# Altium PCB ADC_Shield_lut.PcbDoc
Units mm, origin at the board's own origin, x right, y up, seen from the top; angles counter-clockwise.
Board outline 76.82 x 53.47 mm, 2 copper layers (Top Layer, Bottom Layer); 98 components, 79 nets, 308 pads, 44 vias.
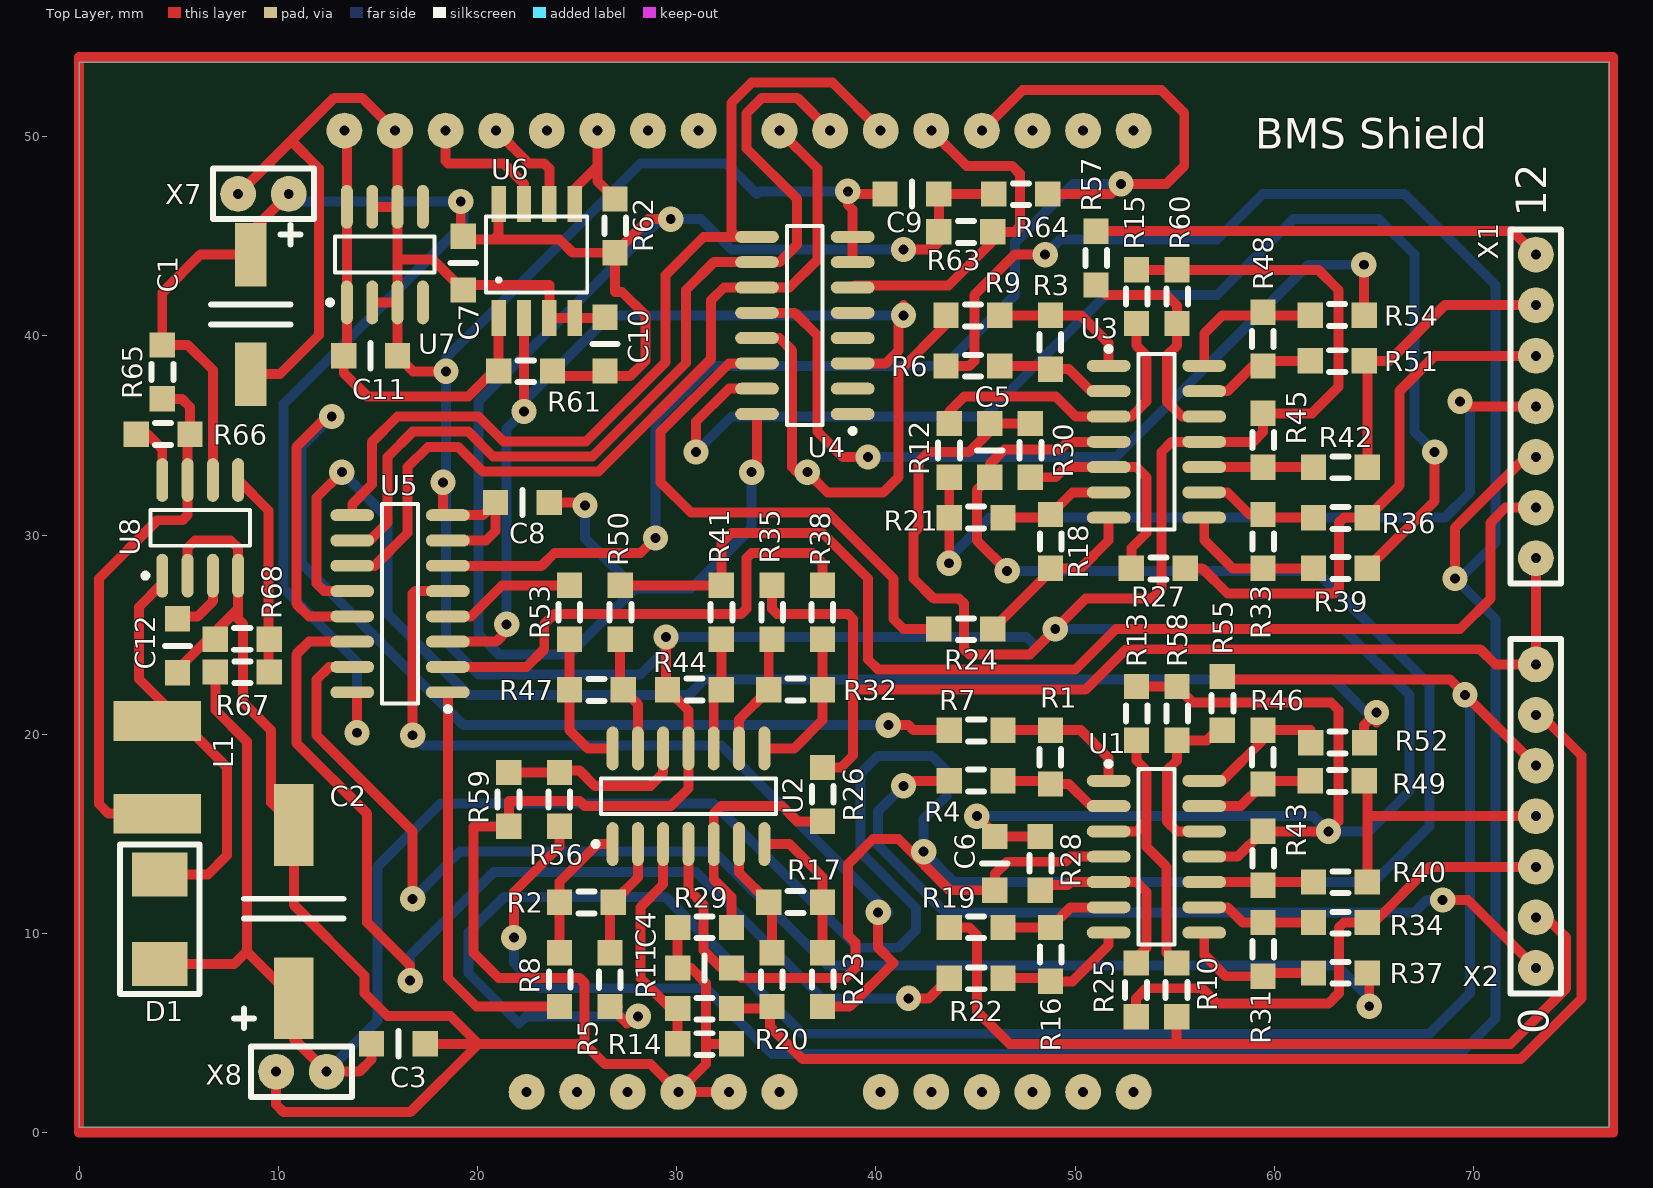
[diagram p0: Top Layer view]
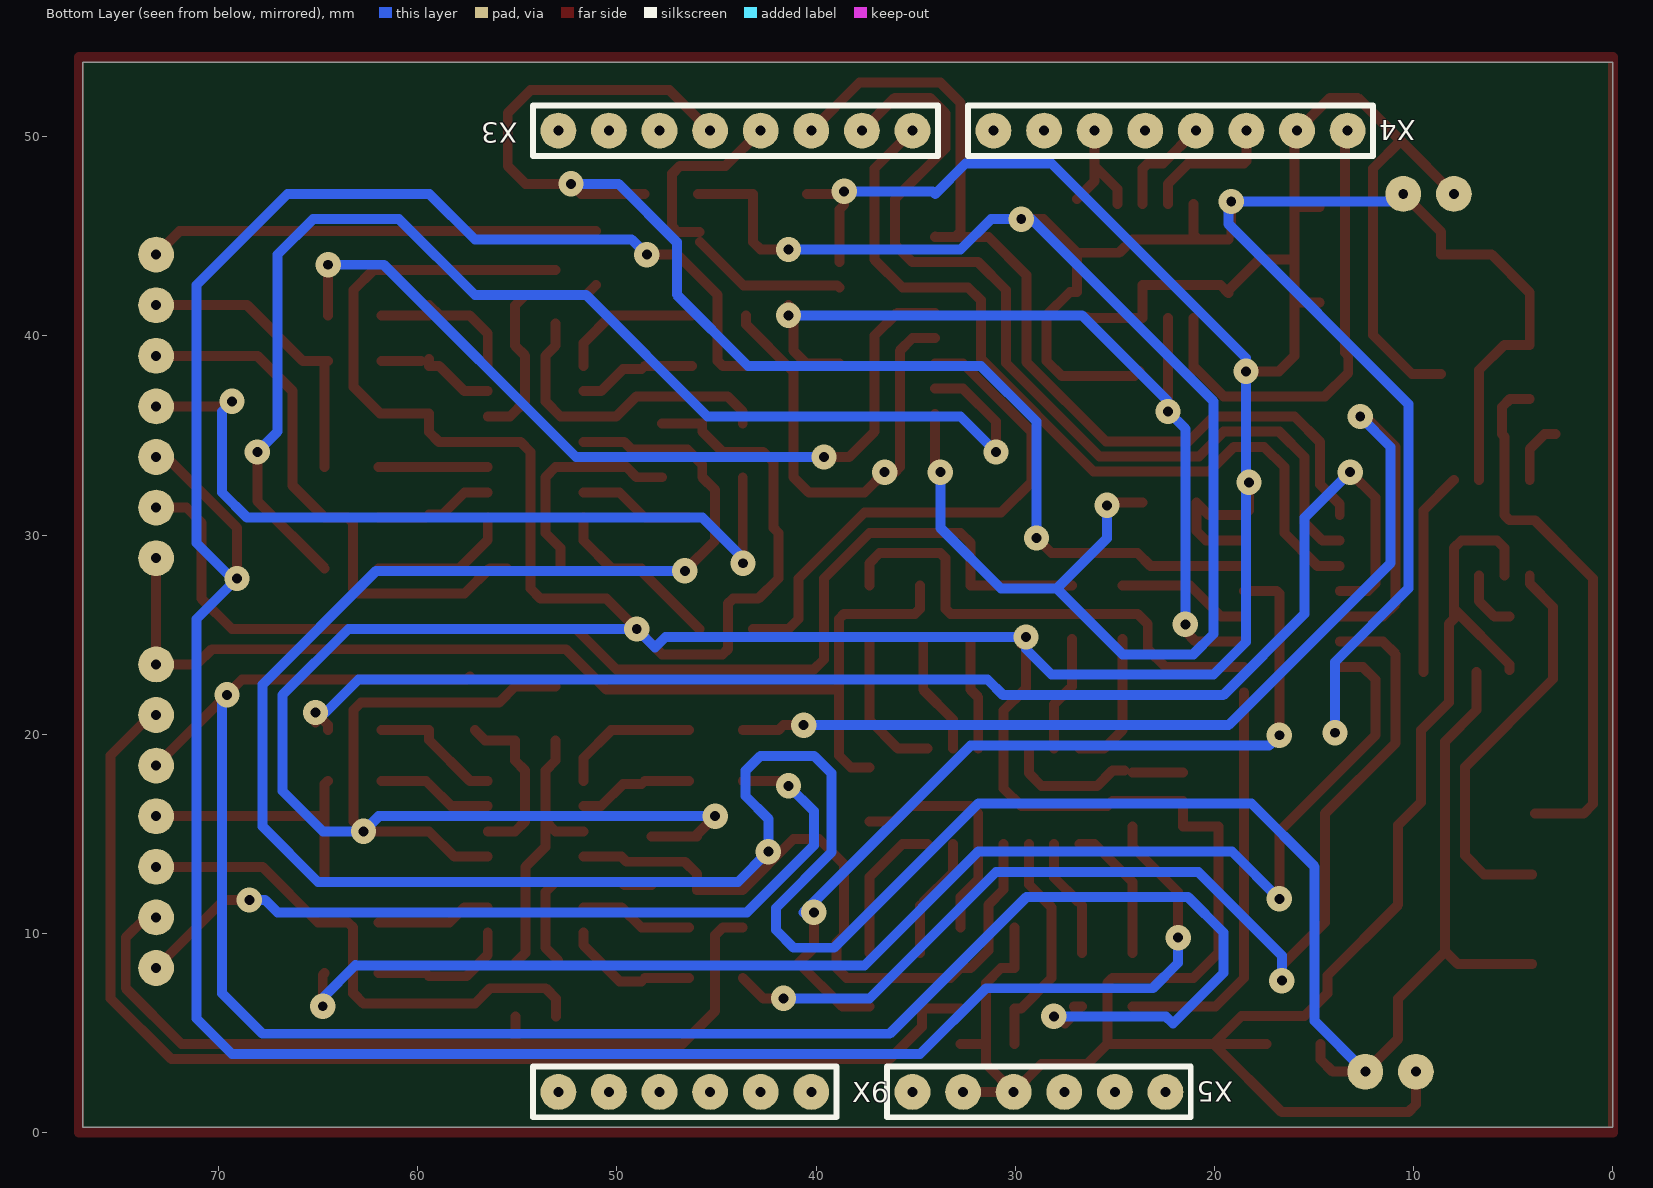
[diagram p1: Bottom Layer view, seen from below]
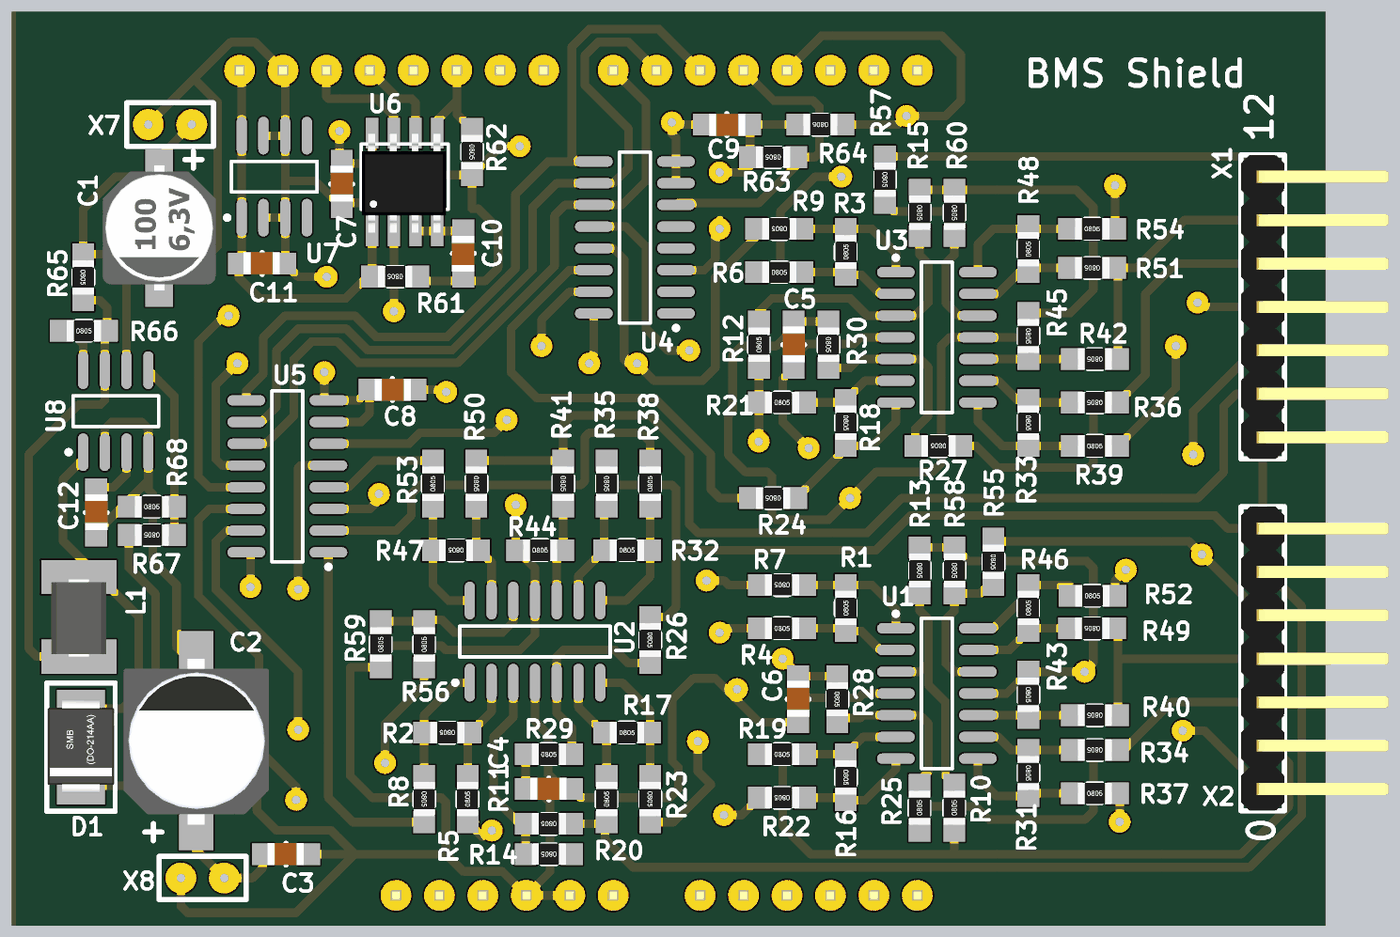
[diagram p2: 3D render of the assembled board from above, using the file's embedded part models]
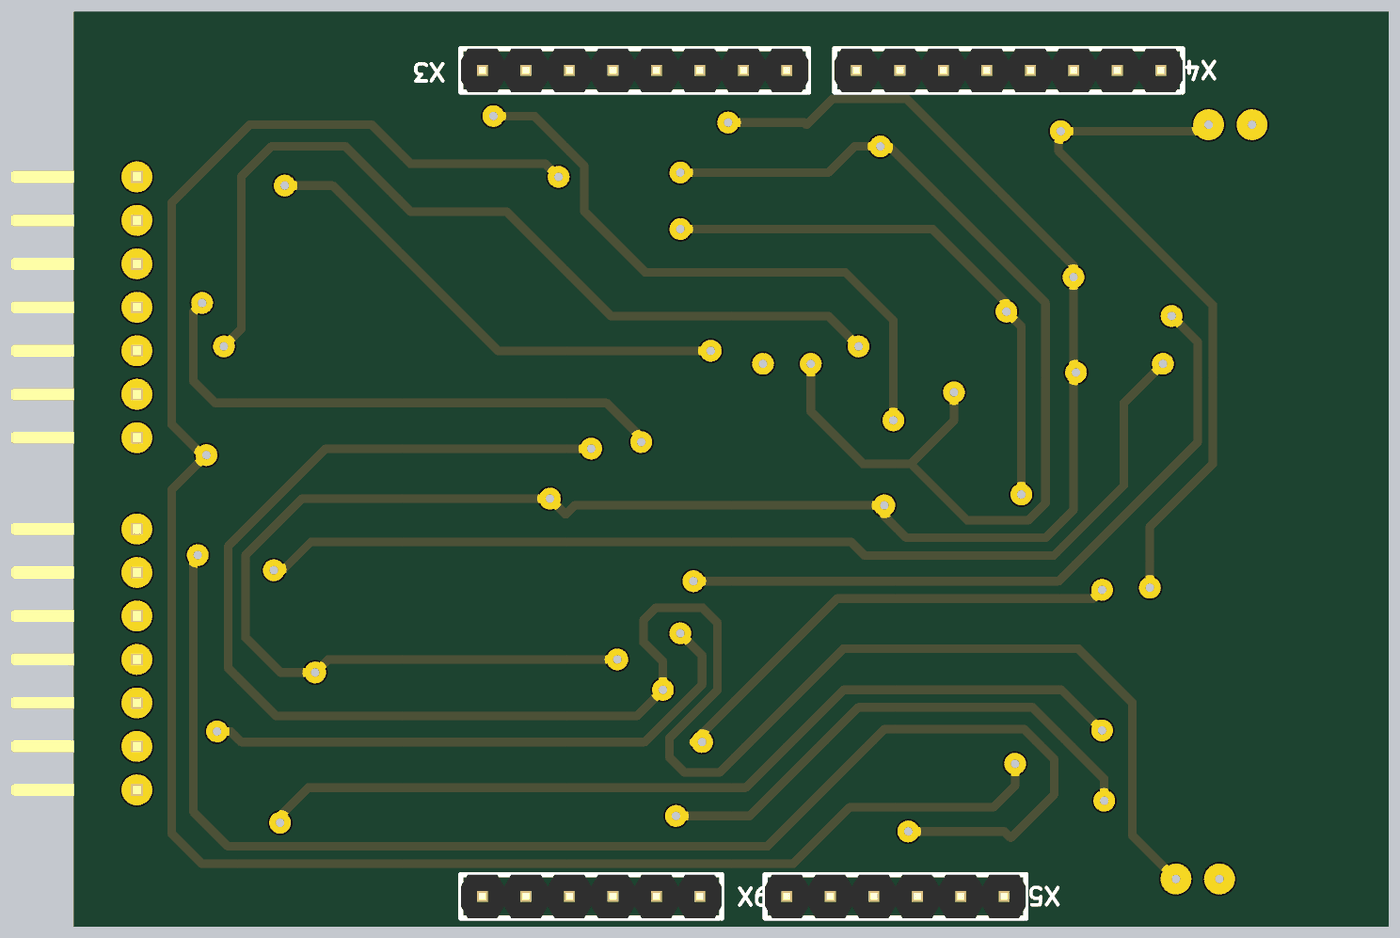
[diagram p3: 3D render of the assembled board from below, using the file's embedded part models]

## Layer stack, top to bottom
Top Solder: solder mask 0.0102, Solder Resist, Dk 3.5
Top Layer: signal copper 0.0356
Dielectric 1: dielectric 0.32, FR-4, Dk 4.8
Bottom Layer: signal copper 0.0356
Bottom Solder: solder mask 0.0102, Solder Resist, Dk 3.5

## Board outline
0,0.27 0,53.737 76.818,53.737 76.818,0.27

## Design rules (kind name [scope] priority, off if disabled: settings)
Clearance [All] p1: gap=0.254
PolygonConnect [All] p1: connectstyle=Relief reliefconductorwidth=0.254 reliefentries=4 polygonreliefangle="90 Angle" airgapwidth=0.254
RoutingVias [All] p1: holewidth=0.711 width=1.27 viastyle="Through Hole" minholewidth=0.711 minwidth=1.27 maxholewidth=0.711 maxwidth=1.27
SolderMaskExpansion [All] p1: expansion=0.102
Width [All] p1: maxlimit=2 minlimit=0.254 preferedwidth=0.5
30 further rules are at their usual default settings.

## Components (designator, comment, footprint, x,y, rotation, side; value= is the part's Value field where it differs from the comment)
C1 "100uF" CAP_EL_SMD_6.3mm 8.619,44.085 r270 top
C2 "470uF" Cap_El_SMD_10mm 10.778,6.747 r90 top
C3 "0.1uF" C0805 17.382,4.461 r180 top
C4 "100nF" C0805 32.749,8.271 r180 top
C5 "100nF" C0805 45.716,32.909 r90 top
C6 "100nF" C0805 45.97,12.175 r90 top
C7 "100nF" C0805 19.287,42.307 r90 top
C8 "100nF" C0805 20.905,31.639 r0 top
C9 "100nF" C0805 40.463,47.133 r0 top
C10 "100nF" C0805 26.399,40.943 r270 top
C11 "100nF" C0805 15.985,39.005 r180 top
C12 "722pF" C0805 4.936,23.097 r90 top
D1 "S2M" SMB_DIODE 4.047,12.97 r270 top
L1 "470uH" L1812 3.92,15.768 r90 top
R1 "249K" R0805 48.764,17.509 r90 top
R2 "249K" R0805 26.813,11.573 r180 top
R3 "249K" R0805 48.764,38.337 r90 top
R4 "499K" R0805 43.684,17.669 r0 top
R5 "499K" R0805 26.653,6.333 r90 top
R6 "499K" R0805 43.524,38.497 r0 top
R7 "10K" R0805 46.384,20.209 r180 top
R8 "10K" R0805 24.113,9.033 r270 top
R9 "10K" R0805 46.224,41.037 r180 top
R10 "499K" R0805 55.101,5.825 r90 top
R11 "499K" R0805 32.749,6.239 r180 top
R12 "499K" R0805 43.684,32.909 r90 top
R13 "249K" R0805 53.082,22.401 r270 top
R14 "249K" R0805 32.749,4.461 r180 top
R15 "249K" R0805 53.082,43.323 r270 top
R16 "249K" R0805 48.764,10.303 r270 top
R17 "249K" R0805 34.621,11.573 r0 top
R18 "249K" R0805 48.764,31.037 r270 top
R19 "499K" R0805 43.684,10.303 r0 top
R20 "499K" R0805 34.781,6.333 r90 top
R21 "499K" R0805 43.684,30.877 r0 top
R22 "10K" R0805 46.384,7.763 r180 top
R23 "10K" R0805 37.321,9.033 r270 top
R24 "10K" R0805 45.863,25.289 r180 top
R25 "499K" R0805 53.069,5.825 r90 top
R26 "499K" R0805 37.321,18.337 r270 top
R27 "499K" R0805 55.528,28.337 r180 top
R28 "249K" R0805 48.256,14.875 r270 top
R29 "249K" R0805 30.049,10.303 r0 top
R30 "249K" R0805 47.748,35.609 r270 top
R31 "249K" R0805 59.432,10.557 r270 top
R32 "249K" R0805 34.621,22.241 r0 top
R33 "249K" R0805 59.432,31.037 r270 top
R34 "499K" R0805 64.672,10.557 r180 top
R35 "499K" R0805 34.781,27.481 r270 top
R36 "499K" R0805 64.672,30.877 r180 top
R37 "10K" R0805 61.972,8.017 r0 top
R38 "10K" R0805 37.321,24.781 r90 top
R39 "10K" R0805 61.972,28.337 r0 top
R40 "499K" R0805 64.672,12.589 r180 top
R41 "499K" R0805 32.241,27.481 r270 top
R42 "499K" R0805 64.672,33.417 r180 top
R43 "249K" R0805 59.432,15.129 r270 top
R44 "249K" R0805 29.541,22.241 r0 top
R45 "249K" R0805 59.432,36.117 r270 top
R46 "249K" R0805 59.432,17.509 r90 top
R47 "249K" R0805 27.321,22.241 r180 top
R48 "249K" R0805 59.432,38.497 r90 top
R49 "499K" R0805 64.512,17.669 r180 top
R50 "499K" R0805 27.161,27.481 r270 top
R51 "499K" R0805 64.512,38.751 r180 top
R52 "10K" R0805 61.832,19.574 r0 top
R53 "10K" R0805 24.621,24.781 r90 top
R54 "10K" R0805 61.812,41.037 r0 top
R55 "499K" R0805 57.387,22.909 r270 top
R56 "499K" R0805 24.113,15.383 r90 top
R57 "499K" R0805 51.05,45.261 r270 top
R58 "249K" R0805 55.114,22.401 r270 top
R59 "249K" R0805 21.573,15.383 r90 top
R60 "249K" R0805 55.114,43.323 r270 top
R61 "1K" R0805 23.765,38.243 r180 top
R62 "10K" R0805 26.907,46.879 r270 top
R63 "10K" R0805 45.863,45.228 r180 top
R64 "10K" R0805 48.624,47.133 r180 top
R65 "1.5" R0805 4.174,39.546 r270 top
R66 "180" R0805 2.871,35.068 r0 top
R67 "15K" R0805 9.541,23.13 r180 top
R68 "1K" R0805 6.841,24.781 r0 top
U1 "LM324AD" SO14_N 54.085,13.859 r0 top
U2 "LM324AD" SO14_N 30.59,16.894 r90 top
U3 "LM324AD" SO14_N 54.085,34.687 r0 top
U4 "M74HC4051M1R" SO16_N 36.432,40.529 r180 top
U5 "M74HC4051M1R" SO16_N 16.112,26.559 r180 top
U6 "MCP3201-BI/SN" SO8 21.065,40.91 r0 top
U7 "TL431ID" SO8_N 15.35,44.085 r90 top
U8 "MC34063AD" 751-05_N 6.079,30.369 r90 top
X1 "PINS 7x2.54" "PINS 7X2.54R angle" 73.135,44.085 r270 top
X2 "PINS 7x2.54" "PINS 7X2.54R angle" 73.135,23.511 r270 top
X3 "Pins 8x2.54" "Pins 8x2.54" 52.942,50.308 r180 bottom
X4 "Pins 8x2.54" "Pins 8x2.54" 31.098,50.308 r180 bottom
X5 "Pins 6x2.54" "Pins 6x2.54" 35.162,2.048 r180 bottom
X6 "Pins 6x2.54" "Pins 6x2.54" 40.242,2.048 r0 bottom
X7 "Pins 2x2.54" "Pins 2x2.54" 7.984,47.133 r0 top
X8 "Pins 2x2.54" "Pins 2x2.54" 9.889,3.064 r0 top

## Footprints (in the part's own frame and the unit in brackets; to place one, negate y for a bottom-side part, rotate by r counter-clockwise, add the part's x,y. Pads: shape width x height; smd on the part's side, far side on the other; paste and mask are expansions set on the pad)
751-05_N [mm] "SOIC, 8-Leads, Body 4.9x3.9mm, Pitch 1.27mm, IPC Medium Density"
  oval 2.2x0.6 smd: 1(-2.4,1.905) 2(-2.4,0.635) 3(-2.4,-0.635) 4(-2.4,-1.905) 5(2.4,-1.905) 6(2.4,-0.635) 7(2.4,0.635) 8(2.4,1.905)
  silkscreen extent -2.52,-2.5 0.9,2.88, body extent -1.95,-2.45 1.95,2.45, height 1.75
C0805 [mm]
  rect 1.27x1.27 smd: 1(0,0) 2(2.7,0)
  silkscreen extent 1.35,-0.63 1.35,0.64, body extent 0.32,-0.66 2.42,0.64, height 0.51
CAP_EL_SMD_6.3mm [mm]
  rect 3.2x1.6 smd: 1(0,0) 2(6,0)
  silkscreen extent -1.5,-2 3.5,2.5, body extent -0.65,-3.3 6.65,3.3, height 5.9
Cap_El_SMD_10mm [mm]
  rect 4.1x2 smd: 1(0,0) 2(8.7,0)
  silkscreen extent -1.5,-2.5 5,3, body extent -0.55,-4.25 9.15,4.25, height 10.3
L1812 [mm]
  rect 2x4.4 smd: 1(0.25,0) 2(4.9,0)
  body extent 0.25,-1.6 4.75,1.6, height 3.2
"Pins 2x2.54" [mm]
  round 1.8 hole 0.5: 1(0,0) 2(2.54,0)
  silkscreen extent -1.27,-1.27 3.81,1.27
"Pins 6x2.54" [mm]
  round 1.8 hole 0.5: 1(0,0) 2(2.54,0) 3(5.08,0) 4(7.62,0) 5(10.16,0) 6(12.7,0)
  silkscreen extent -1.27,-1.27 13.97,1.27, body extent -1.27,-1.27 13.97,1.27, height 8.81
"PINS 7X2.54R angle" [mm]
  round 1.8 hole 0.5: 1(0,0) 2(2.54,0) 3(5.08,0) 4(7.62,0) 5(10.16,0) 6(12.7,0) 7(15.24,0)
  silkscreen extent -1.27,-1.27 16.51,1.27, body extent -1.27,-1.27 16.51,7.35, height 5.45
"Pins 8x2.54" [mm]
  round 1.8 hole 0.5: 1(0,0) 2(2.54,0) 3(5.08,0) 4(7.62,0) 5(10.16,0) 6(12.7,0) 7(15.24,0) 8(17.78,0)
  silkscreen extent -1.27,-1.27 19.05,1.27, body extent -1.27,-1.27 19.05,1.27, height 8.81
R0805 [mm]
  rect 1.27x1.27 smd: 1(0,0) 2(2.7,0)
  silkscreen extent 0.94,-0.53 1.75,0.56, body extent 0.35,-0.62 2.35,0.63, height 0.61
SMB_DIODE [mm]
  rect 2.2x2.8 smd: 1(0,0) 2(4.5,0)
  silkscreen extent -1.5,-2 6,2, body extent -0.55,-1.95 4.95,1.95, height 2.45
SO8 [mm]
  rect 0.72x1.8 smd: 1(0,0) 2(1.27,0) 3(2.54,0) 4(3.81,0) 5(3.81,5.715) 6(2.54,5.715) 7(1.27,5.715) 8(0,5.715)
  silkscreen extent -0.64,1.27 4.44,5.08, body extent -0.58,-0.1 4.32,5.68, height 1.45
SO8_N [mm] "SOIC, 8-Leads, Body 4.9x3.9mm, Pitch 1.27mm, IPC Medium Density"
  oval 2.2x0.6 smd: 1(-2.4,1.905) 2(-2.4,0.635) 3(-2.4,-0.635) 4(-2.4,-1.905) 5(2.4,-1.905) 6(2.4,-0.635) 7(2.4,0.635) 8(2.4,1.905)
  silkscreen extent -2.52,-2.5 0.9,2.88, body extent -1.95,-2.45 1.95,2.45, height 1.75
SO14_N [mm] "SOIC, 14-Leads, Body 8.7x3.9mm, Pitch 1.27mm, IPC Medium Density"
  oval 2.2x0.6 smd: 1(-2.4,3.81) 2(-2.4,2.54) 3(-2.4,1.27) 4(-2.4,0) 5(-2.4,-1.27) 6(-2.4,-2.54) 7(-2.4,-3.81) 8(2.4,-3.81) 9(2.4,-2.54) 10(2.4,-1.27) 11(2.4,0) 12(2.4,1.27) 13(2.4,2.54) 14(2.4,3.81)
  silkscreen extent -2.52,-4.4 0.9,4.78, body extent -1.95,-4.33 1.95,4.33, height 1.75
SO16_N [mm] "SOIC, 16-Leads, Body 9.9x3.9mm, Pitch 1.27mm, IPC Medium Density"
  oval 2.2x0.6 smd: 1(-2.4,4.445) 2(-2.4,3.175) 3(-2.4,1.905) 4(-2.4,0.635) 5(-2.4,-0.635) 6(-2.4,-1.905) 7(-2.4,-3.175) 8(-2.4,-4.445) 9(2.4,-4.445) 10(2.4,-3.175) 11(2.4,-1.905) 12(2.4,-0.635) 13(2.4,0.635) 14(2.4,1.905) 15(2.4,3.175) 16(2.4,4.445)
  silkscreen extent -2.53,-5 0.9,5.42, body extent -1.95,-4.95 1.95,4.95, height 1.75

## Part data
C1 C2: library part Cond_polar
C3 C4 C5 C6 C7 C8 C9 C10 C11 C12: library part Condensator
D1: library part Diod
L1: library part Inductance
R1 R2 R3 R4 R5 R6 R7 R8 R9 R10 R11 R12 R13 R14 R15 R16 R17 R18 R19 R20 R21 R22 R23 R24 R25 R26 R27 R28 R29 R30 R31 R32 R33 R34 R35 R36 R37 R38 R39 R40 R41 R42 R43 R44 R45 R46 R47 R48 R49 R50 R51 R52 R53 R54 R55 R56 R57 R58 R59 R60 R61 R62 R63 R64 R65 R66 R67 R68: library part Resistor
U1 U2 U3: "Low-Power Quad Operational Amplifier"
U4 U5: "Analog Multiplexer/Demultiplexer Single 8-Channel"
U7: "Programmable Voltage Reference"
U8: "DC-to-DC Converter Control Circuit"

## Via types
v1: diameter 1.27, hole 0.5, Top Layer to Bottom Layer, 44 vias

## Nets (pads, with @x,y where several pads share a name; then routed paths per layer and width w, separated by ;. In a path a pad name is that pad's centre, name@x,y a point inside that pad or via, vN(x,y) a via of type N, cw(c..) or ccw(c..) an arc to the next point about the centre after c; other vN are vias at no path point)
+20V: C2.1 C3.2 C4.1 C5.1 C6.1 D1.2 R67.2 U1.4 U2.4 U3.4 X8.2 | length 197.8
  Top Layer w0.5: D1.2 7.785,8.47 8.42,9.105 ; R67.2 6.841,21.225 8.42,19.646 8.42,9.105 ; C3.2 14.682,3.682 14.064,3.064 X8.2 10.778,4.715 C2.1 8.42,9.105 ; U2.4 30.59,12.208 31.352,11.446 31.352,9.16 32.241,8.271 C4.1 33.257,7.763 38.464,7.763 38.972,8.271 38.972,9.541 38.611,9.902 38.611,13.498 39.861,14.748 41.131,14.748 43.704,12.175 C6.1 45.97,12.983 46.592,13.605 49.513,13.605 49.767,13.859 U1.4 ; v1(46.592,28.21) 45.068,29.734 45.068,32.261 C5.1 45.716,33.557 46.465,34.306 49.259,34.306 49.64,34.687 U3.4
  Bottom Layer w0.5: X8.2 14.969,5.604 14.969,13.351 18.144,16.526 31.86,16.526 39.099,9.287 41.131,9.287 42.02,10.176 42.02,11.287 39.226,14.081 39.226,18.05 40.095,18.919 42.802,18.919 43.544,18.177 43.544,16.907 42.401,15.764 v1(42.401,14.113) 43.925,12.589 65.007,12.589 67.801,15.383 67.801,22.495 62.086,28.21 v1(46.592,28.21)
A: U4.11 U5.11 X3.8 | length 41.7
  Top Layer w0.5: U5.11 14.842,28.464 16.493,30.115 16.493,33.417 17.509,34.433 19.033,34.433 20.267,33.199 26.078,33.199 31.733,38.854 31.733,41.799 32.368,42.434 35.67,42.434 37.067,43.831 37.067,48.403 X3.8
ADC_IN: U4.3 U5.3 U6.2 | length 45.6
  Top Layer w0.5: U5.3 20.938,24.654 21.463,25.179 v1(21.463,25.527) ; v1@22.335,36.719 U6.2 ; U4.3 40.496,38.624 41.131,39.259 41.131,41.291 41.385,41.545 v1(41.385,41.037)
  Bottom Layer w0.5: v1(21.463,25.527) 21.463,35.339 v1(22.335,36.211) 22.335,36.719 26.653,41.037 v1(41.385,41.037)
B: U4.10 U5.10 X3.7 | length 46.4
  Top Layer w0.5: U5.10 14.588,29.734 15.477,30.623 15.477,33.925 16.747,35.195 19.541,35.195 20.783,33.953 25.766,33.953 30.463,38.65 30.463,42.307 31.86,43.704 U4.10 35.162,43.704 36.051,44.593 36.051,46.879 33.511,49.419 33.511,51.181 34.289,51.959 36.051,51.959 X3.7
BAL0: R4.1 X2.7 | length 42
  Top Layer w0.5: v1(41.385,17.415) 41.639,17.669 R4.1 ; v1(68.453,11.684) 69.722,11.684 X2.7
  Bottom Layer w0.5: v1(41.385,17.415) 40.115,16.145 40.115,14.413 43.463,11.065 67.039,11.065 67.658,11.684 v1(68.453,11.684)
BAL1: R10.1 R19.1 X2.6 | length 42.6
  Top Layer w0.5: R19.1 44.687,10.303 45.068,9.922 45.068,6.112 46.719,4.461 55.101,4.461 ; R10.1 55.101,4.461 ; X2.6 73.643,10.811 74.659,9.795 74.659,7.255 71.865,4.461 55.101,4.461
BAL2: R25.1 R34.1 X2.5 | length 26.3
  Top Layer w0.5: R25.1 53.069,6.747 53.577,7.255 56.371,7.255 57.133,6.493 62.734,6.493 63.242,7.001 63.242,10.303 63.496,10.557 R34.1 65.007,10.557 67.801,13.351 X2.5
BAL3: R40.1 R49.1 X2.4 | length 13.6
  Top Layer w0.5: R49.1 64.672,17.509 64.672,15.891 ; R40.1 64.672,15.891 ; X2.4 64.672,15.891
BAL4: R5.1 R55.1 X2.3 | length 101.2
  Top Layer w0.5: R5.1 R5.1@27.067,6.333 ; R5.1@26.86,6.126 27.509,5.477 27.874,5.842 v1(28.067,5.842) ; R55.1 57.547,22.749 68.817,22.749 v1(69.579,21.987) X2.3
  Bottom Layer w0.5: v1(28.067,5.842) 22.446,5.842 22.081,5.477 19.541,8.017 19.541,10.049 21.319,11.827 29.447,11.827 36.305,4.969 67.801,4.969 69.833,7.001 69.833,21.733 v1(69.579,21.987)
BAL5: R11.1 R20.1 X2.2 | length 60.8
  Top Layer w0.5: R11.1 34.687,6.239 34.687,5.317 36.305,3.699 72.373,3.699 75.421,6.747 75.421,18.939 73.389,20.971 X2.2
BAL6: R26.1 R35.1 X1.7 X2.1 | length 54.9
  Top Layer w0.5: R35.1 34.781,26.305 35.035,26.051 38.591,26.051 38.845,25.797 38.845,22.241 ; R26.1 38.243,18.337 38.845,18.939 38.845,22.241 ; X1.7 X2.1 71.103,23.511 70.341,24.273 52.561,24.273 50.529,22.241 38.845,22.241
BAL7: R41.1 R50.1 X1.6 | length 59.1
  Top Layer w0.5: R50.1 R41.1 32.241,29.607 32.749,30.115 37.321,30.115 39.607,27.829 39.607,23.765 40.115,23.257 50.021,23.257 52.053,25.289 69.325,25.289 70.849,26.813 70.849,30.623 71.611,31.385 X1.6
BAL8: R6.1 R56.1 X1.5 | length 141.4
  Top Layer w0.5: v1(21.827,9.795) 21.827,12.081 24.113,14.367 R56.1 ; R6.1 44.687,38.497 44.941,38.751 44.941,42.053 46.973,44.085 v1(48.497,44.085) ; v1(69.071,27.829) 69.071,30.369 72.627,33.925 X1.5
  Bottom Layer w0.5: v1(21.827,9.795) 21.827,8.525 23.097,7.255 31.479,7.255 34.781,3.953 69.325,3.953 71.103,5.731 71.103,25.797 v1(69.071,27.829) 69.325,27.829 71.103,29.607 71.103,42.561 66.531,47.133 59.419,47.133 57.133,44.847 49.259,44.847 v1(48.497,44.085)
BAL9: R12.1 R21.1 X1.4 | length 40.8
  Top Layer w0.5: v1(43.671,28.591) 43.671,28.845 43.684,28.858 R21.1 R12.1 ; v1(69.325,36.719) 69.579,36.465 X1.4
  Bottom Layer w0.5: v1(43.671,28.591) 43.671,28.845 45.703,30.877 68.563,30.877 69.833,32.147 69.833,36.211 v1(69.325,36.719)
BAL10: R27.1 R36.1 X1.3 | length 27.8
  Top Layer w0.5: R27.1 56.384,28.337 57.654,27.067 62.988,27.067 63.242,27.321 63.242,30.623 63.496,30.877 R36.1 66.277,32.482 66.277,37.227 68.055,39.005 X1.3
BAL11: R42.1 R51.1 X1.2 | length 15
  Top Layer w0.5: R51.1 65.769,38.751 68.563,41.545 X1.2 ; R42.1 R51.1@64.672,38.591
BAL12: R57.1 X1.1 | length 22.6
  Top Layer w0.5: R57.1 71.959,45.261 X1.1
C: U4.9 U5.9 X3.6 | length 47
  Top Layer w0.5: U5.9 13.712,31.557 14.695,32.54 14.695,34.667 15.985,35.957 20.049,35.957 21.299,34.707 25.453,34.707 29.447,38.701 29.447,43.069 31.352,44.974 U4.9 U4.9@34.02,44.986 ; U4.9@33.004,44.986 32.749,45.241 32.749,51.705 33.765,52.721 37.829,52.721 X3.6
CLK: U6.7 X4.6 | length 7
  Top Layer w0.5: X4.6 18.398,48.784 18.525,48.657 21.319,48.657 22.335,47.641 U6.7
CS: R62.1 U6.5 X4.3 | length 6.2
  Top Layer w0.5: U6.5 24.875,47.387 26.018,48.53 ; X4.3 26.018,48.53 ; R62.1 26.018,47.768 26.018,48.53
EN1: R63.1 U4.6 X3.5 | length 17.4
  Top Layer w0.5: U4.6 38.939,42.541 43.651,42.541 R63.1@45.83,44.72 ; X3.5 44.56,48.53 46.846,48.53 47.227,48.149 47.227,45.482 46.973,45.228 R63.1
EN2: R64.1 U5.6 X3.4 | length 68.3
  Top Layer w0.5: U5.6 23.224,28.464 23.859,29.099 28.177,29.099 v1(28.939,29.861) ; X3.4 47.354,52.34 54.339,52.34 55.482,51.197 55.482,48.53 54.593,47.641 v1(52.307,47.641) 51.799,47.133 R64.1
  Bottom Layer w0.5: v1(28.939,29.861) 28.939,35.703 31.733,38.497 43.417,38.497 46.993,42.073 46.993,44.708 49.926,47.641 v1(52.307,47.641)
GND: C1.2 C2.2 C3.1 C4.2 C5.2 C6.2 C7.1 C8.1 C9.1 C10.1 C11.1 C12.1 R13.1 R14.1 R15.1 R28.1 R29.1 R30.1 R43.1 R44.1 R45.1 R58.1 R59.1 R60.1 R68.1 U1.11 U2.11 U3.11 U4.7 U4.8 U5.7 U5.8 U6.3 U6.4 U7.2 U7.3 U7.6 U7.7 U8.2 U8.4 X4.7 X5.2 X5.3 X7.1 X8.1 | length 394.9
  Top Layer w0.5: C12.1@5.19,23.224 5.19,23.511 7.984,26.305 ; U8.2 5.444,29.353 5.825,29.734 7.603,29.734 7.984,29.353 7.984,26.305 ; X7.1 10.651,49.8 ; C1.2 10.085,38.085 12.048,40.048 12.048,48.403 10.651,49.8 ; X8.1 9.889,1.413 10.27,1.032 16.62,1.032 20.049,4.461 ; U7.2 U7.3 ; U7.7 U7.6 ; C3.1 20.049,4.461 ; v1(18.271,32.655) 18.271,31.245 U5.8 20.27,31.004 C8.1 20.905,30.209 20.43,29.734 U5.7 ; v1(18.415,38.227) 16.763,38.227 C11.1 U7.3 ; C10.1 26.366,40.91 U6.4 U6.3 23.605,42.561 19.701,42.561 19.287,42.147 C7.1 17.763,43.831 15.985,43.831 ; v1(29.464,24.892) v1@29.464,24.764 ; v1@29.701,24.527 v1@29.464,24.764 ; R29.1 C4.2 30.717,8.271 31.479,7.509 31.479,4.461 ; X5.2 X5.3 ; R14.1 31.479,4.461 ; v1(38.591,47.26) 38.591,46.599 38.832,46.358 U4.8 U4.7 ; v1@38.718,47.133 C9.1 ; v1(45.068,15.891) 45.97,14.989 C6.2 R28.1 ; R30.1 C5.2 45.716,35.208 44.687,34.179 42.655,34.179 42.147,33.671 42.147,30.369 41.893,30.115 41.893,27.829 42.909,26.813 44.179,26.813 44.433,26.559 44.433,24.273 44.695,24.011 47.727,24.011 v1(49.005,25.289) 50.529,26.813 53.831,26.813 54.344,27.326 54.344,33.221 54.339,33.226 54.339,34.179 54.847,34.687 U3.11 58.944,34.687 59.432,35.175 R45.1 61.898,36.117 63.229,37.448 63.229,42.307 62.213,43.323 R60.1 R15.1 ; R13.1 R58.1 55.909,21.606 62.848,21.606 63.229,21.225 63.229,15.637 v1(62.721,15.129) R43.1 58.162,13.859 U1.11 ; 7.984,26.305 7.984,25.797 8.238,25.543 8.238,21.606 9.635,20.209 9.635,16.59 C2.2 10.778,11.446 14.334,7.89 14.334,7.001 15.477,5.858 18.652,5.858 20.049,4.461 ; 10.651,49.8 12.81,51.959 14.207,51.959 15.985,50.181 U7.6 ; U7.3 15.985,43.831 ; 15.985,43.831 U7.6 ; 20.049,4.461 25.383,4.461 ; 25.383,4.461 25.383,7.509 25.129,7.763 21.065,7.763 19.795,9.033 19.795,15.383 R59.1 21.573,16.653 25.129,16.653 25.383,16.399 29.701,16.399 30.59,17.288 U2.11 30.59,21.192 R44.1 29.464,22.318 v1@29.464,24.764 ; 25.383,4.461 26.392,3.452 28.678,3.452 X5.3 ; X5.3 31.479,3.445 31.479,4.461
  Bottom Layer w0.5: v1(38.591,47.26) 34.146,47.26 34.019,47.133 32.495,48.657 28.177,48.657 18.415,38.895 v1(18.415,38.227) 18.415,24.637 20.049,23.003 28.177,23.003 29.464,24.29 v1(29.464,24.892) 47.558,24.892 48.083,24.367 v1(49.005,25.289) 63.483,25.289 66.785,21.987 66.785,17.161 64.753,15.129 v1(62.721,15.129) 61.959,15.891 v1(45.068,15.891)
MISO: U6.6 X4.5 | length 5.2
  Top Layer w0.5: X4.5 22.589,48.657 23.351,48.657 23.605,48.403 U6.6
MULT0: R7.2 U5.13 | length 57.4
  Top Layer w0.5: v1@12.81,35.83 12.302,35.83 10.905,34.433 10.905,26.559 11.54,25.924 U5.13 ; v1(40.623,20.463) 41.639,20.463 41.893,20.209 R7.2
  Bottom Layer w0.5: v1(12.683,35.957) 11.159,34.433 11.159,28.591 19.287,20.463 v1(40.623,20.463)
MULT1: R22.2 U5.14 | length 55
  Top Layer w0.5: U5.14 11.54,24.654 10.905,24.019 10.905,19.574 14.461,16.018 14.461,10.557 16.62,8.398 v1(16.62,7.636) ; v1(41.639,6.747) 42.642,6.747 42.655,6.734 R22.2
  Bottom Layer w0.5: v1(16.62,7.636) 16.62,8.906 20.811,13.097 30.971,13.097 37.321,6.747 v1(41.639,6.747)
MULT2: R37.2 U5.15 | length 68.9
  Top Layer w0.5: U5.15 12.556,23.384 11.921,22.749 11.921,19.955 16.747,15.129 v1@16.747,12.081 ; R37.2 64.77,7.919 v1(64.77,6.35)
  Bottom Layer w0.5: v1(16.747,11.742) 19.118,14.113 31.86,14.113 37.575,8.398 63.119,8.398 63.119,8.415 64.77,6.764 v1(64.77,6.35)
MULT3: R52.2 U5.12 | length 70.1
  Top Layer w0.5: v1(13.191,33.163) 11.921,31.893 11.921,27.575 12.302,27.194 U5.12 ; 64.512,20.209 64.512,20.476 64.88,20.844 65.134,20.59 v1(65.134,21.098)
  Bottom Layer w0.5: v1(13.191,33.163) 15.477,30.877 15.477,26.051 19.561,21.967 30.61,21.967 31.392,22.749 62.975,22.749 64.626,21.098 v1(65.134,21.098)
MULT4: R8.2 U5.1 | length 20.5
  Top Layer w0.5: U5.1 18.512,7.776 19.955,6.333 R8.2
MULT5: R23.2 U5.5 | length 44.3
  Top Layer w0.5: v1(16.747,19.955) 16.747,27.067 16.874,27.194 U5.5 ; R23.2 38.685,6.333 40.877,8.525 40.115,9.287 v1(40.115,11.065)
  Bottom Layer w0.5: v1(16.747,19.955) 17.255,19.447 32.241,19.447 40.623,11.065 v1(40.115,11.065)
MULT6: R38.2 U5.2 | length 24.7
  Top Layer w0.5: U5.2 22.462,23.384 23.351,24.273 23.351,25.543 23.859,26.051 33.257,26.051 33.511,26.305 33.511,28.845 33.765,29.099 36.813,29.099 37.321,28.591 R38.2
MULT7: R53.2 U5.4 | length 6.8
  Top Layer w0.5: U5.4 19.668,25.924 21.225,27.481 R53.2
MULT8: R9.2 U4.13 | length 23.2
  Top Layer w0.5: U4.13 35.162,39.894 35.797,39.259 35.797,33.417 36.051,33.163 v1(36.559,33.163) 37.575,32.147 40.369,32.147 41.131,32.909 41.131,38.193 43.524,40.586 R9.2
MULT9: R24.2 U4.14 | length 27
  Top Layer w0.5: U4.14 32.622,38.624 29.193,35.195 29.193,32.655 30.717,31.131 37.575,31.131 40.877,27.829 40.877,25.797 41.385,25.289 R24.2
MULT10: R39.2 U4.15 | length 64.5
  Top Layer w0.5: v1(30.971,34.179) 30.971,35.703 32.622,37.354 U4.15 ; R39.2 68.055,31.72 v1(68.055,34.179)
  Bottom Layer w0.5: v1(30.971,34.179) 32.749,35.957 45.449,35.957 51.545,42.053 57.133,42.053 60.943,45.863 65.261,45.863 67.039,44.085 67.039,35.195 v1(68.055,34.179)
MULT11: R54.2 U4.12 | length 42.8
  Top Layer w0.5: U4.12 35.924,41.164 37.067,40.021 37.067,35.195 38.337,33.925 v1@39.353,33.925 ; v1@64.499,43.831 64.512,43.818 R54.2
  Bottom Layer w0.5: v1(39.607,33.925) 52.053,33.925 61.705,43.577 v1(64.499,43.577)
NetC12_2: C12.2 U8.3 | length 3.1
  Top Layer w0.5: C12.2@5.19,25.924 5.952,25.924 6.714,26.686 U8.3
NetD1_1: D1.1 L1.2 U8.1 | length 20.1
  Top Layer w0.5: D1.1 6.47,12.97 7.427,13.927 7.427,18.353 3,22.78 3,26.401 4.174,27.575 U8.1
NetL1_1: L1.1 R65.2 R66.2 U8.7 | length 27.3
  Top Layer w0.5: L1.1 1.482,16.018 1,16.5 1,27.83 3.92,30.75 5.19,30.75 5.444,31.004 U8.7 5.444,34.941 R66.2 5.571,36.429 5.154,36.846 R65.2
NetR1_1: R1.1 R4.2 U1.2 | length 5.6
  Top Layer w0.5: R4.2 R1.1@48.604,17.669 ; R1.1 49.686,17.509 50.796,16.399 U1.2
NetR1_2: R1.2 R7.1 U1.1 | length 7
  Top Layer w0.5: R7.1 R1.2 50.288,20.209 51.685,18.812 U1.1
NetR2_1: R2.1 R5.2 U2.2 | length 5.8
  Top Layer w0.5: R5.2 R2.1@26.653,11.413 ; R2.1 28.05,12.81 U2.2
NetR2_2: R2.2 R8.1 U2.1 | length 7
  Top Layer w0.5: R8.1 24.113,12.589 26.018,14.494 U2.1
NetR3_1: R3.1 R6.2 U3.2 | length 5.8
  Top Layer w0.5: R6.2 R3.1@48.604,38.497 ; R3.1 49.686,38.337 50.796,37.227 U3.2
NetR3_2: R3.2 R9.1 U3.1 | length 7.2
  Top Layer w0.5: R9.1 R3.2 50.288,41.037 51.685,39.64 U3.1
NetR10_2: R10.2 R13.2 U1.3 | length 14.1
  Top Layer w0.5: U1.3 53.082,15.129 53.59,15.637 ; R13.2 53.082,18.685 53.59,18.177 53.59,15.637 ; R10.2 54.593,9.033 54.593,13.351 53.59,14.354 53.59,15.637
NetR11_2: R11.2 R14.2 U2.3 | length 11.5
  Top Layer w0.5: U2.3 29.32,12.462 28.177,11.319 28.177,7.763 29.701,6.239 R11.2 R14.2
NetR12_2: R12.2 R15.2 U3.3 | length 15.7
  Top Layer w0.5: R12.2 43.684,36.211 44.446,36.973 49.018,36.973 50.034,35.957 U3.3 52.828,35.957 53.59,36.719 53.59,39.005 53.082,39.513 R15.2
NetR16_1: R16.1 R19.2 U1.6 | length 5.7
  Top Layer w0.5: R19.2 R16.1 49.78,11.319 U1.6
NetR16_2: R16.2 R22.1 U1.7 | length 6.5
  Top Layer w0.5: R22.1 R16.2@48.604,7.763 ; R16.2 49.874,7.603 51.685,9.414 U1.7
NetR17_1: R17.1 R20.2 U2.6 | length 5.9
  Top Layer w0.5: U2.6 33.13,13.064 R17.1 ; R20.2 R17.1@34.781,11.413
NetR17_2: R17.2 R23.1 U2.7 | length 7.4
  Top Layer w0.5: U2.7 35.67,14.494 37.321,12.843 R17.2 R23.1
NetR18_1: R18.1 R21.2 U3.6 | length 5.6
  Top Layer w0.5: R21.2 R18.1@48.604,30.877 ; R18.1 49.874,32.147 U3.6
NetR18_2: R18.2 R24.1 U3.7 | length 8.9
  Top Layer w0.5: R24.1 48.764,28.19 R18.2 50.288,28.337 51.685,29.734 U3.7
NetR25_2: R25.2 R28.2 U1.5 | length 9.3
  Top Layer w0.5: R28.2@48.256,12.429 49.62,12.429 49.78,12.589 U1.5 53.082,12.589 53.59,12.081 53.59,9.287 R25.2@52.948,8.645
NetR26_2: R26.2 R29.2 U2.5 | length 12
  Top Layer w0.5: R29.2 32.749,11.827 31.86,12.716 U2.5 31.86,16.018 32.241,16.399 35.289,16.399 36.051,15.637 R26.2
NetR27_2: R27.2 R30.2 U3.5 | length 11.2
  Top Layer w0.5: R30.2 49.018,32.909 49.526,33.417 U3.5 53.082,33.417 53.59,32.909 53.59,30.115 52.828,29.353 R27.2
NetR31_1: R31.1 R34.2 U1.9 | length 5.8
  Top Layer w0.5: U1.9 57.654,11.319 58.416,10.557 R31.1 R34.2
NetR31_2: R31.2 R37.1 U1.8 | length 6.9
  Top Layer w0.5: U1.8 56.485,8.932 57.56,7.857 R31.2 ; R31.2@59.592,8.017 R37.1
NetR32_1: R32.1 R35.2 U2.9 | length 5.9
  Top Layer w0.5: U2.9 33.13,20.75 R32.1 R35.2@34.621,24.621
NetR32_2: R32.2 R38.1 U2.8 | length 7.6
  Top Layer w0.5: U2.8 35.898,19.294 37.321,20.717 R32.2 R38.1
NetR33_1: R33.1 R36.2 U3.9 | length 5.8
  Top Layer w0.5: U3.9 57.654,32.147 58.764,31.037 R33.1 ; R33.1@59.592,30.877 R36.2
NetR33_2: R33.2 R39.1 U3.8 | length 7.2
  Top Layer w0.5: U3.8 56.485,29.76 57.908,28.337 R33.2 R39.1
NetR40_2: R40.2 R43.2 U1.10 | length 5.5
  Top Layer w0.5: U1.10 R40.2
NetR41_2: R41.2 R44.2 U2.10 | length 5.6
  Top Layer w0.5: U2.10 31.86,21.86 R44.2 R41.2
NetR42_2: R42.2 R45.2 U3.10 | length 5.5
  Top Layer w0.5: U3.10 R45.2 R42.2
NetR46_1: R46.1 R49.2 U1.13 | length 5.6
  Top Layer w0.5: U1.13 58.322,16.399 R46.1 ; R46.1@59.592,17.669 R49.2
NetR46_2: R46.2 R52.1 U1.14 | length 6.7
  Top Layer w0.5: U1.14 57.387,17.669 59.432,19.714 R46.2 61.812,20.209
NetR47_1: R47.1 R50.2 U2.13 | length 5.6
  Top Layer w0.5: R47.1@27.161,22.401 R50.2 ; R47.1 28.05,21.512 U2.13
NetR47_2: R47.2 R53.1 U2.14 | length 7.1
  Top Layer w0.5: R53.1 R47.2 24.621,20.209 25.536,19.294 U2.14
NetR48_1: R48.1 R51.2 U3.13 | length 5.8
  Top Layer w0.5: U3.13 57.654,37.227 58.924,38.497 R48.1 R48.1@59.432,38.845 ; R48.1@59.846,38.751 R51.2
NetR48_2: R48.2 R54.1 U3.14 | length 7.5
  Top Layer w0.5: U3.14 56.485,40.122 57.4,41.037 58.924,41.037 R48.2@59.432,41.545 ; R48.2@59.432,41.037 R54.1
NetR55_2: R55.2 R58.2 U1.12 | length 8.6
  Top Layer w0.5: U1.12 55.114,15.129 54.606,15.637 54.606,18.177 55.114,18.685 R58.2 56.625,19.701 R55.2@57.133,20.209
NetR56_2: R56.2 R59.2 U2.12 | length 9.2
  Top Layer w0.5: R59.2 R56.2 ; R56.2@24.527,18.177 25.129,18.177 25.891,17.415 28.685,17.415 29.32,18.05 U2.12
NetR57_2: R57.2 R60.2 U3.12 | length 11.7
  Top Layer w0.5: R57.2 51.558,42.053 54.593,42.053 55.114,41.532 R60.2 55.114,39.513 54.606,39.005 54.606,36.719 55.368,35.957 U3.12
NetR66_1: R66.1 U8.8 | length 3.2
  Top Layer w0.5: R66.1 3.432,35.068 4.174,34.326 U8.8
NetR67_1: R67.1 R68.2 U8.5 | length 10.3
  Top Layer w0.5: U8.5 9.508,31.245 R67.1@9.508,23.13
REF: C11.2 R61.2 U6.1 U7.1 U7.8 X4.8 | length 23.8
  Top Layer w0.5: X4.8 13.445,50.181 U7.8 U7.1 13.445,39.165 C11.2 13.285,38.149 14.461,36.973 19.541,36.973 R61.2@21.065,38.497 ; R61.2 R61.2@21.065,38.497 ; U6.1 R61.2@21.065,38.497
VCC: C1.1 C7.2 C8.2 C9.2 C10.2 R61.1 R62.2 R63.2 R64.2 R65.1 U4.16 U5.16 U6.8 U8.6 X7.2 | length 164.3
  Top Layer w0.5: U8.6 6.714,38.286 5.454,39.546 R65.1 4.174,42.174 6.085,44.085 C1.1 8.619,45.228 X7.2 ; v1(13.953,20.082) U5.16@13.953,21.873 ; C7.2@19.16,45.134 v1(19.16,46.752) ; C7.2@19.287,44.847 20.811,44.847 ; U6.8 21.065,45.101 20.811,44.847 ; C8.2 25.637,31.639 25.494,31.496 v1(25.4,31.496) ; R61.1 24.019,37.989 27.669,37.989 28.431,38.751 28.431,41.037 27.255,42.213 26.907,42.213 R62.2 ; v1(29.701,45.863) 28.591,45.863 R62.2 ; v1(33.765,33.163) 33.791,33.163 34.032,32.922 U4.16 ; v1(41.385,44.339) 42.782,44.339 43.163,44.72 R63.2 C9.2 R64.2 ; 20.811,44.847 24.113,44.847 24.781,44.179 R62.2
  Bottom Layer w0.5: X7.2 10.905,46.752 v1(19.16,46.752) ; v1(13.953,20.082) 13.953,23.638 10.27,27.321 10.27,36.592 19.287,45.609 v1@19.287,46.879 ; v1(25.4,31.496) 25.4,29.844 27.923,27.321 ; v1(33.765,33.163) 33.765,30.369 30.717,27.321 27.923,27.321 ; v1(41.385,44.339) 32.749,44.339 31.225,45.863 v1(29.701,45.863) 29.193,45.863 20.049,36.719 20.049,25.035 21.065,24.019 24.621,24.019 27.923,27.321
pads on no net: U4.1 U4.2 U4.4 U4.5 U7.4 U7.5 X3.1 X3.2 X3.3 X4.1 X4.2 X4.4 X5.1 X5.4 X5.5 X5.6 X6.1 X6.2 X6.3 X6.4 X6.5 X6.6
copper on no net: | length 262
  Top Layer w0.5: 0,0 77,0 77,54 0,54 0,0

## Silkscreen, mask and mechanical layers (free items; w line width, h text height)
Top Overlay:
  text "BMS Shield" at 59.055,49.403 h1.52
  text "12" at 73.66,45.974 h1.52 r90
  text "0" at 73.787,4.953 h1.52 r90
Mechanical 13:
  lines w0.15: 9,53.229 9,26.686 9,-1 52.688,-1 76.818,-1 ; 13.318,53.229 0.364,53.229 85.835,53.229 ; 76.818,-2.524 76.818,53.229 ; 76.818,8.271 76.818,53.229 ; 76.818,53.229 76.818,53.229